# Altium PCB 智能颜色传感器模块.PCBDOC
Units mm, origin at the board's own origin, x right, y up, seen from the top; angles counter-clockwise.
Board outline 152.4 x 101.6 mm, 2 copper layers (Top Layer, Bottom Layer); 16 components, 12 nets, 82 pads, 8 vias.
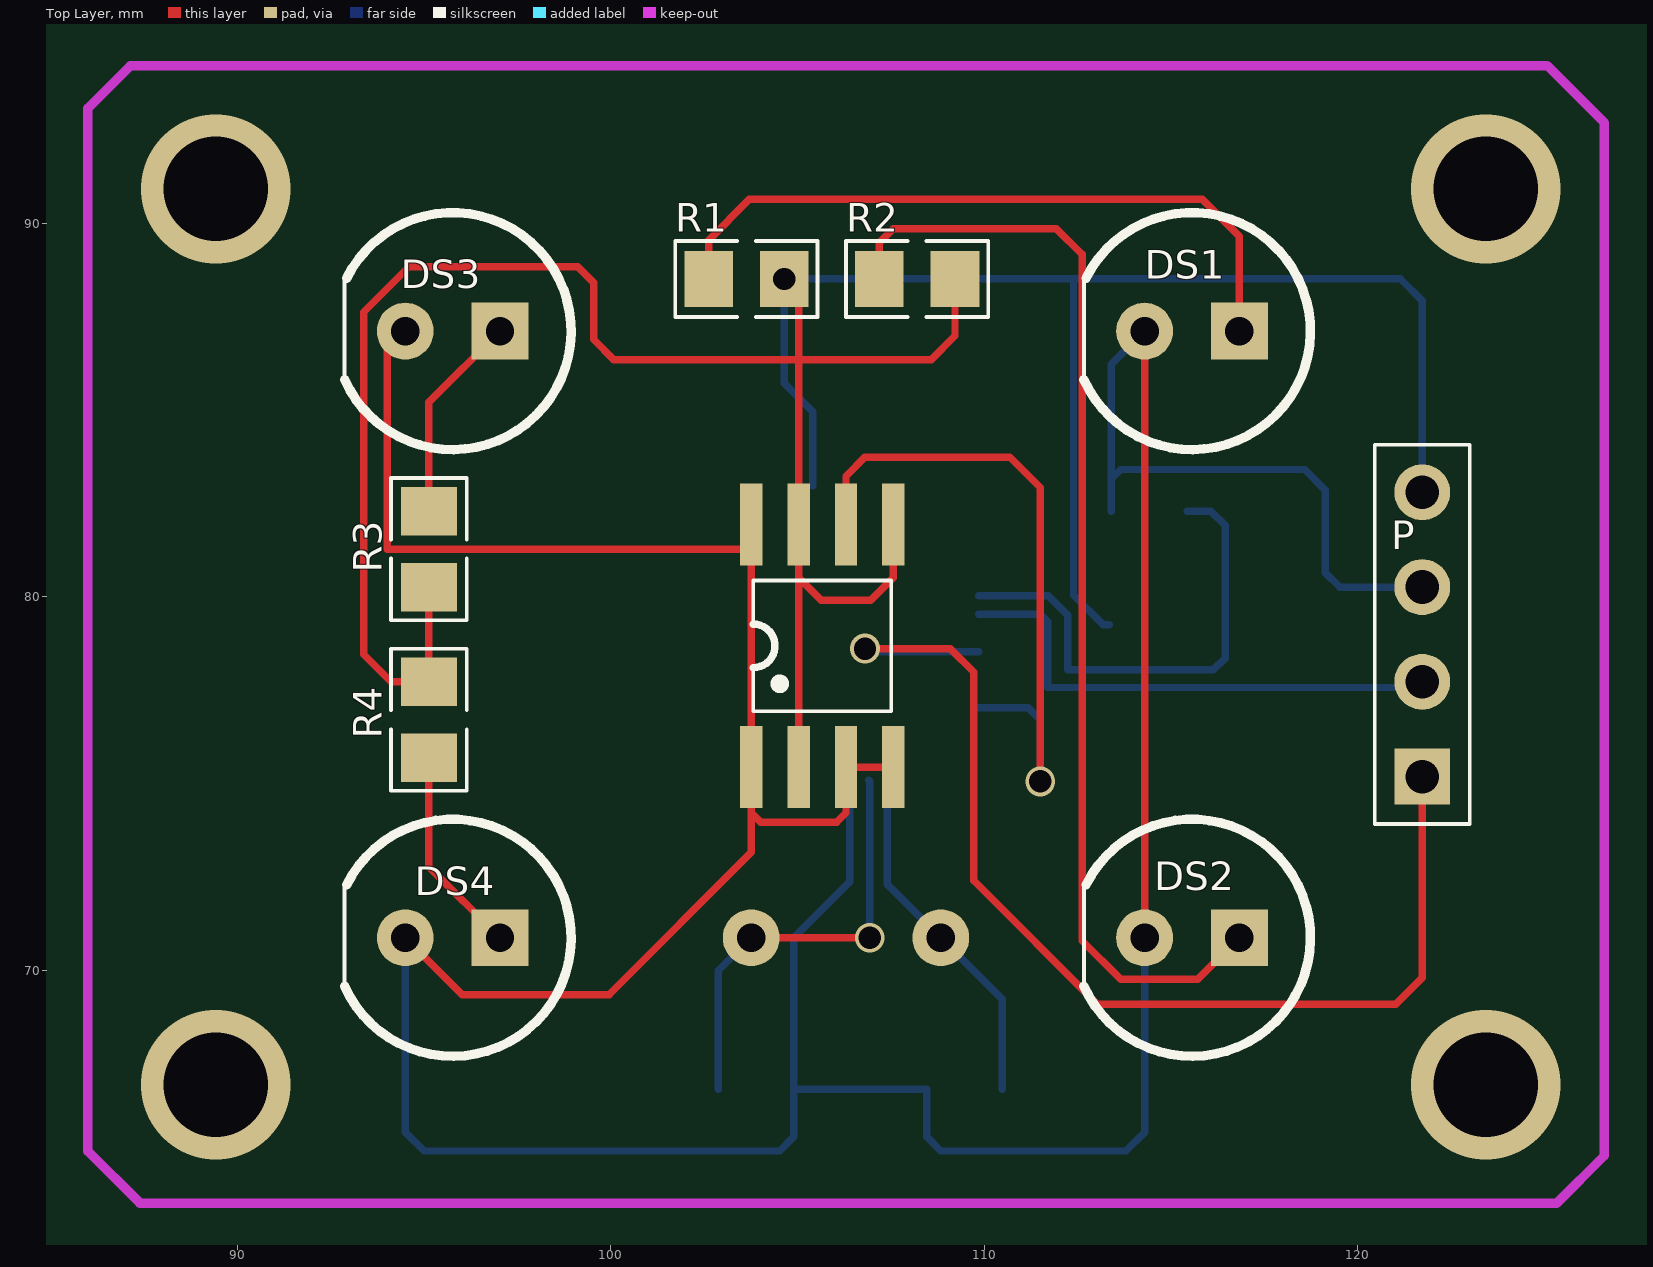
[diagram p0: Top Layer view]
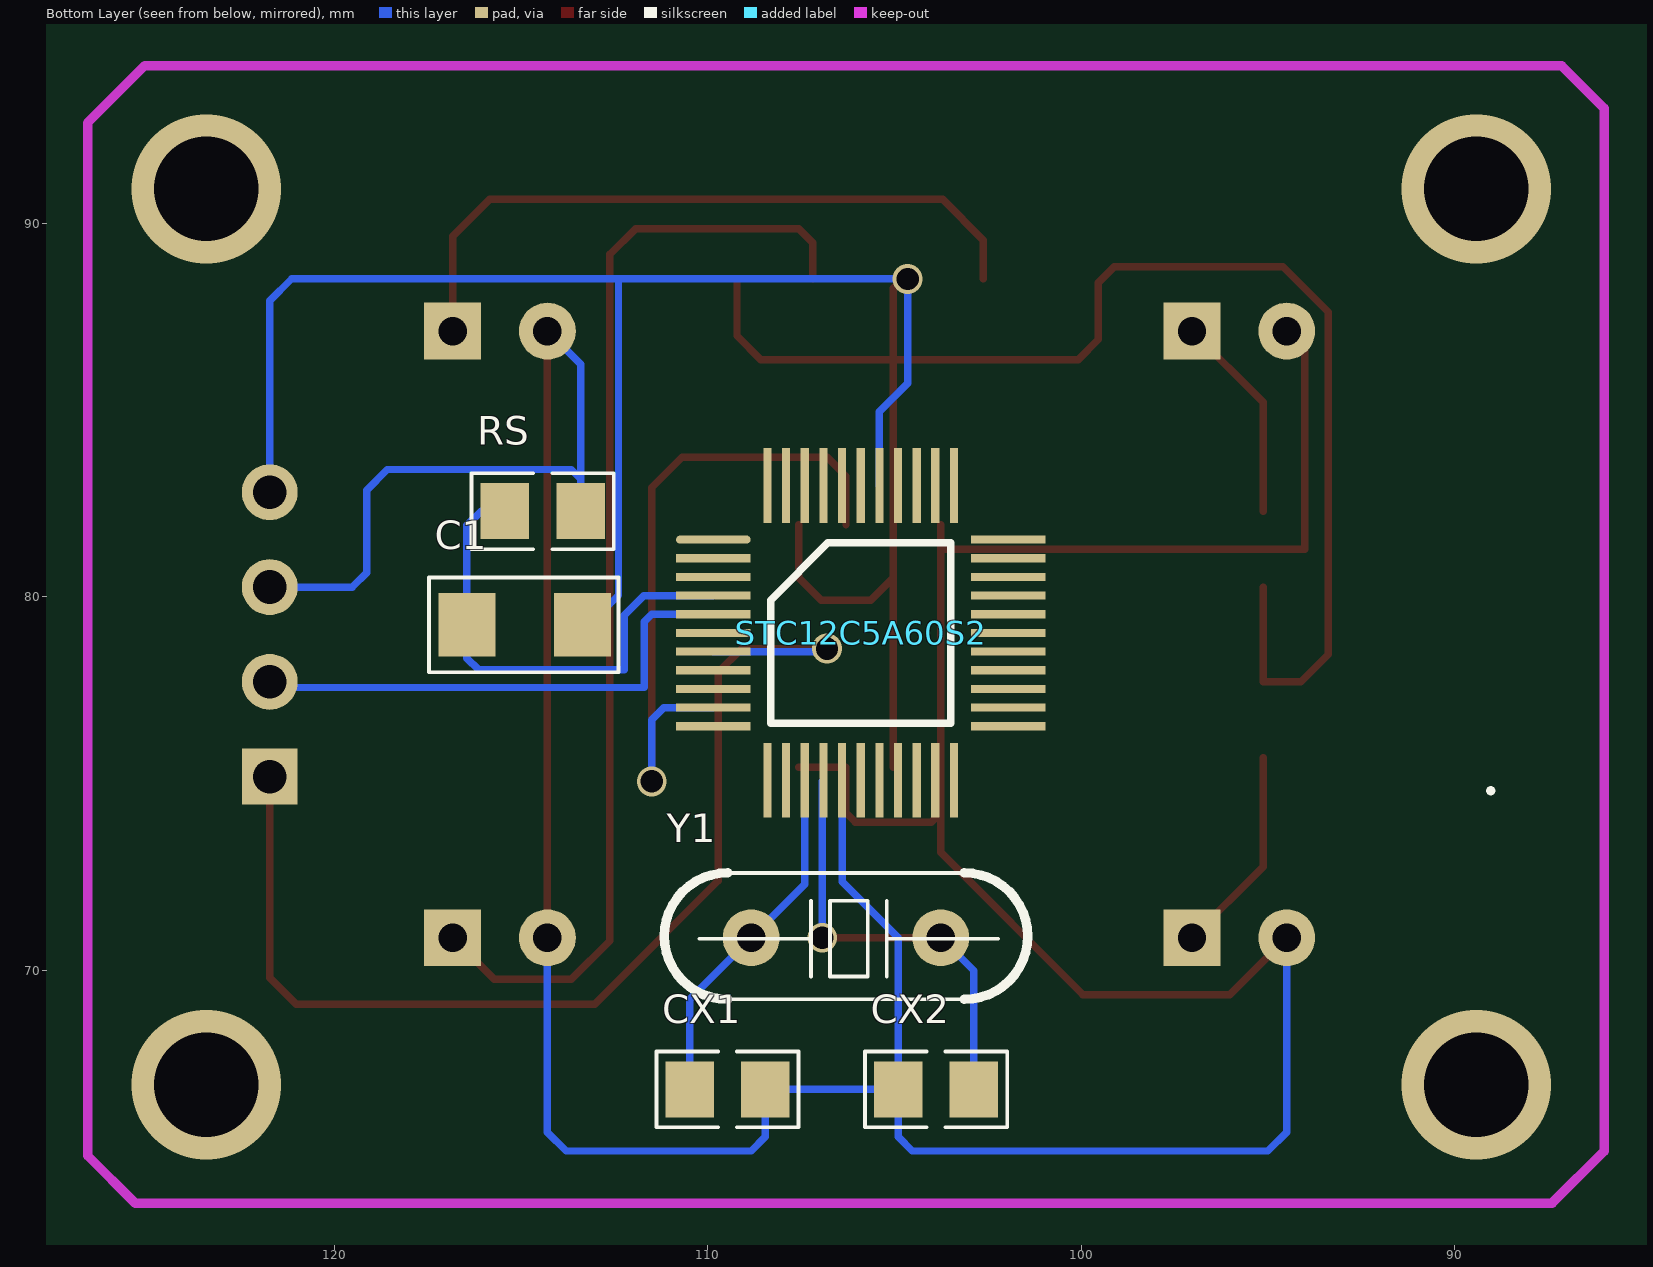
[diagram p1: Bottom Layer view, seen from below]

## Layer stack, top to bottom
Top Layer: signal copper 0.0356
Dielectric: dielectric 0.32, FR-4, Dk 4.8
Bottom Layer: signal copper 0.0356

## Board outline
25.4,25.4 177.8,25.4 177.8,127 25.4,127

## Design rules (kind name [scope] priority, off if disabled: settings)
Clearance [All] p1: gap=0.254
ComponentClearance [All] p1: gap=0.254 collisioncheckmode=0 verticalgap=0.254
PolygonConnect [All] p1: connectstyle=Relief reliefconductorwidth=0.254 reliefentries=4 polygonreliefangle="90 Angle"
RoutingVias [All] p1: holewidth=0.6 width=0.8 viastyle="Through Hole" minholewidth=0.6 minwidth=0.8 maxholewidth=0.6 maxwidth=0.8
SolderMaskExpansion [All] p1: expansion=0.102
TestPointUsage [All] p1: valid=0 allowmultiple=FALSE
Testpoint [All] p1: side=15 testpointundercomponent=TRUE minsize=1.016 maxsize=2.54 preferedsize=1.524 minholesize=0 maxholesize=1.016 preferedholesize=0.813 testpointgrid=0.025 style=1023 order=0123456789
Width [All] p1: maxlimit=0.2 minlimit=0.2 preferedwidth=0.2
17 further rules are at their usual default settings.

## Classes and differential pairs
component class Sheet1: C1 CX1 CX2 DS1 DS2 DS3 DS4 P R1 R2 R3 R4 RS Y1 ""

## Components (designator, comment, footprint, x,y, rotation, side; value= is the part's Value field where it differs from the comment)
C1 "10uf" 10uf 112.395,77.978 r0 bottom
CX1 "30p" TP-0805-R 106.934,65.532 r180 bottom
CX2 "30p" TP-0805-R 106.426,68.072 r0 bottom
DS1 "LED1" LED_5 114.3,84.582 r180 top
DS2 "LED1" LED_5 114.3,68.326 r180 top
DS3 "LED1" LED_5 94.488,84.582 r180 top
DS4 "LED1" LED_5 94.488,68.326 r180 top
P "" HDR-4 123.063,81.534 r90 top
R1 "Res2" TP-0805-R 106.172,87.249 r0 top
R2 "Res2" TP-0805-R 110.744,87.249 r0 top
R3 "Res2" TP-0805-R 93.853,78.74 r270 top
R4 "Res2" TP-0805-R 96.393,79.248 r90 top
RS "10k" TP-0805-R 116.967,83.566 r0 bottom
STC12C5A60S2 "" stc12c5a60s2 109.855,81.534 r180 bottom
TCS230 "" CDFP-8 108.204,74.93 r0 top
Y1 "Y" JZ_ZC 108.839,70.866 r0 bottom

## Footprints (in the part's own frame and the unit in brackets; to place one, negate y for a bottom-side part, rotate by r counter-clockwise, add the part's x,y. Pads: shape width x height; smd on the part's side, far side on the other; paste and mask are expansions set on the pad)
10uf [mil] "10贴片电容"
  rect 60x66.93 smd: 1(37.95,-50) 2(160,-50)
  silkscreen extent 0,-100 200,0
CDFP-8 [mm] "贴片8管脚"
  rect 0.6x2.2 smd: 1(-4.445,0.508) 2(-3.175,0.508) 3(-1.905,0.508) 4(-0.635,0.508) 5(-0.635,7.008) 6(-1.905,7.008) 7(-3.175,7.008) 8(-4.445,7.008)
  silkscreen extent -4.39,2.01 -0.69,5.51
HDR-4 [mm] "4排针"
  rect 1.5x1.5 hole 0.9: 1(-6.35,1.322)
  round 1.5 hole 0.9: 2(-3.81,1.322) 3(-1.27,1.322) 4(1.27,1.322)
  silkscreen extent -7.62,0.05 2.54,2.59
JZ_ZC [mil] "晶振"
  round 60 hole 30: 1(-200,0) 2(0,0)
  silkscreen extent -292,-68 92,65
LED_5 [mil] "发光二极管 5MM"
  rect 60x60 hole 30: 1(-100,-100)
  round 60 hole 30: 2(0,-100)
  silkscreen extent -175,-225 64,25
stc12c5a60s2 [mm]
  oval 2x0.22 smd: 1(0,0)
  rect 2x0.22 smd: 2(0,-0.5) 3(0,-1) 4(0,-1.5) 5(0,-2) 6(0,-2.5) 7(0,-3) 8(0,-3.5) 9(0,-4) 10(0,-4.5) 11(0,-5) 23(7.9,-5) 24(7.9,-4.5) 25(7.9,-4) 26(7.9,-3.5) 27(7.9,-3) 28(7.9,-2.5) 29(7.9,-2) 30(7.9,-1.5) 31(7.9,-1) 32(7.9,-0.5) 33(7.9,0)
  rect 0.22x2 smd: 12(1.45,-6.45) 13(1.95,-6.45) 14(2.45,-6.45) 15(2.95,-6.45) 16(3.45,-6.45) 17(3.95,-6.45) 18(4.45,-6.45) 19(4.95,-6.45) 20(5.45,-6.45) 21(5.95,-6.45) 22(6.45,-6.45) 34(6.45,1.45) 35(5.95,1.45) 36(5.45,1.45) 37(4.95,1.45) 38(4.45,1.45) 39(3.95,1.45) 40(3.45,1.45) 41(2.95,1.45) 42(2.45,1.45) 43(1.95,1.45) 44(1.45,1.45)
  silkscreen extent 1.54,-4.92 6.36,-0.08
TP-0805-R [mm] "贴片0805"
  rect 1.3x1.5 smd: 1(-3.556,1.27) 2(-1.524,1.27)
  silkscreen extent -4.44,0.25 -0.63,2.29

## Part data
C1: library part "CAPACITOR POL", "Capacitor"
CX1 CX2: library part CAP, "Capacitor"
DS1 DS2 DS3 DS4: "Typical RED GaAs LED"
P: library part PZ_4, "排针——4"
R1 R2 R3 R4: "Resistor"
RS: library part RES2
STC12C5A60S2: library part STC12C5A60S2_LQFP
TCS230: library part TCS230, "颜色识别传感器"
Y1: library part CRYSTAL, "Crystal"

## Via types
v1: diameter 0.8, hole 0.6, Top Layer to Bottom Layer, 4 vias
v2: diameter 4, hole 2.8, Top Layer to Bottom Layer, 4 vias

## Nets (pads, with @x,y where several pads share a name; then routed paths per layer and width w, separated by ;. In a path a pad name is that pad's centre, name@x,y a point inside that pad or via, vN(x,y) a via of type N, cw(c..) or ccw(c..) an arc to the next point about the centre after c; other vN are vias at no path point)
GND: CX1.2 CX2.2 DS1.2 DS2.2 DS3.2 DS4.2 P.3 RS.1 STC12C5A60S2.16 TCS230.1 TCS230.3 TCS230.4 TCS230.8 | length 116.2
  Top Layer w0.2: DS4.2 96.012,69.342 99.949,69.342 103.759,73.152 TCS230.1 TCS230.8@103.759,81.28 ; DS3.2 94.005,86.639 94.005,81.28 TCS230.8@103.759,81.28 ; 103.759,74.219 104.013,73.965 106.045,73.965 106.299,74.219 TCS230.3 TCS230.4 ; TCS230.8 TCS230.8@103.759,81.28 ; DS2.2 DS1.2
  Bottom Layer w0.2: DS4.2 94.488,65.659 94.996,65.151 104.521,65.151 104.902,65.532 104.902,70.866 106.405,72.369 STC12C5A60S2.16 ; CX2.2 CX1.2 108.458,65.532 108.839,65.151 113.792,65.151 114.3,65.659 DS2.2 ; RS.1 113.411,86.233 DS1.2 ; 113.411,83.16 113.665,83.414 118.591,83.414 119.144,82.861 119.144,80.645 119.525,80.264 P.3
H: C1.1 P.4 R1.2 R2.2 R3.2 R4.2 STC12C5A60S2.38 TCS230.2 TCS230.5 TCS230.7 | length 89.7
  Top Layer w0.2: R3.2 R4.2 94.107,77.724 93.37,78.461 93.37,87.63 94.59,88.849 99.111,88.849 99.538,88.422 99.538,86.898 100.076,86.36 108.585,86.36 109.22,86.995 R2.2 ; v1(104.648,88.519) 104.775,88.519 105.029,88.265 TCS230.2 ; 105.029,80.518 105.639,79.908 106.959,79.908 107.569,80.518 TCS230.5
  Bottom Layer w0.2: STC12C5A60S2.38 105.405,84.963 104.648,85.72 v1(104.648,88.519) 121.158,88.519 121.741,87.936 P.4 ; 112.395,88.519 112.395,80.042 113.189,79.248 C1.1
NetDS1_1: DS1.1 R1.1 | length 18.7
  Top Layer w0.2: R1.1 102.616,89.56 103.708,90.653 115.849,90.653 116.84,89.662 DS1.1
NetDS2_1: DS2.1 R2.1 | length 30.3
  Top Layer w0.2: R2.1 107.188,89.484 107.569,89.865 111.938,89.865 112.624,89.179 112.624,70.79 113.663,69.75 115.724,69.75 DS2.1
NetDS3_1: DS3.1 R3.1 | length 5.6
  Top Layer w0.2: R3.1 95.123,85.217 DS3.1
NetDS4_1: DS4.1 R4.1 | length 5.6
  Top Layer w0.2: R4.1 95.123,72.771 DS4.1
OUT: STC12C5A60S2.10 TCS230.6 | length 18.4
  Top Layer w0.2: TCS230.6 106.299,83.236 106.807,83.744 110.693,83.744 111.506,82.931 v1(111.506,75.057)
  Bottom Layer w0.2: STC12C5A60S2.10 111.18,77.034 111.506,76.708 v1(111.506,75.057)
RST: C1.2 RS.2 STC12C5A60S2.4 | length 13.1
  Bottom Layer w0.2: STC12C5A60S2.4 111.717,80.034 112.243,79.508 112.243,78.044 116.144,78.044 116.459,78.359 116.459,81.915 116.078,82.296 RS.2
RXD: P.2 STC12C5A60S2.5 | length 13.8
  Bottom Layer w0.2: STC12C5A60S2.5 111.506,79.534 111.709,79.331 111.709,77.572 121.437,77.572 121.59,77.724 P.2
TXD: P.1 STC12C5A60S2.7 | length 30.9
  Top Layer w0.2: v1(106.807,78.613) 109.093,78.613 109.728,77.978 109.728,72.39 113.03,69.088 121.031,69.088 121.741,69.798 P.1
  Bottom Layer w0.2: v1(106.807,78.613) 106.886,78.534 STC12C5A60S2.7
XTAL1: CX2.1 STC12C5A60S2.15 Y1.1 | length 11.8
  Top Layer w0.2: Y1.1 v1(106.934,70.866)
  Bottom Layer w0.2: CX2.1 102.87,69.977 Y1.1 ; STC12C5A60S2.15 106.934,75.055 v1(106.934,70.866)
XTAL2: CX1.1 STC12C5A60S2.14 Y1.2 | length 9.6
  Bottom Layer w0.2: STC12C5A60S2.14 107.405,72.3 110.49,69.215 CX1.1
pads on no net: STC12C5A60S2.1 STC12C5A60S2.2 STC12C5A60S2.3 STC12C5A60S2.6 STC12C5A60S2.8 STC12C5A60S2.9 STC12C5A60S2.11 STC12C5A60S2.12 STC12C5A60S2.13 STC12C5A60S2.17 STC12C5A60S2.18 STC12C5A60S2.19 STC12C5A60S2.20 STC12C5A60S2.21 STC12C5A60S2.22 STC12C5A60S2.23 STC12C5A60S2.24 STC12C5A60S2.25 STC12C5A60S2.26 STC12C5A60S2.27 STC12C5A60S2.28 STC12C5A60S2.29 STC12C5A60S2.30 STC12C5A60S2.31 STC12C5A60S2.32 STC12C5A60S2.33 STC12C5A60S2.34 STC12C5A60S2.35 STC12C5A60S2.36 STC12C5A60S2.37 STC12C5A60S2.39 STC12C5A60S2.40 STC12C5A60S2.41 STC12C5A60S2.42 STC12C5A60S2.43 STC12C5A60S2.44
copper on no net:
  other v2: 89.408,66.929 123.444,66.929 89.408,90.932 123.444,90.932

## Keep-outs
Keep-Out Layer:
  lines w0.254: 85.979,65.151 85.979,92.964 85.979,93.091 87.122,94.234 125.095,94.234 126.619,92.71 126.619,65.024 125.349,63.754 87.376,63.754 85.979,65.151

## Silkscreen, mask and mechanical layers (free items; w line width, h text height)
Bottom Overlay:
  circle w0.254: c89.027,74.803 r0
Mechanical 1:
  lines w0.254: 85.979,65.151 87.376,63.754 ; 85.979,65.151 85.979,93.091 ; 85.979,65.151 87.376,63.754 ; 85.979,65.151 85.979,93.091 ; 85.979,93.091 87.122,94.234 ; 85.979,93.091 87.122,94.234 ; 87.122,94.234 125.095,94.234 ; 87.122,94.234 125.095,94.234 ; 87.376,63.754 125.349,63.754 ; 87.376,63.754 125.349,63.754 ; 125.095,94.234 126.619,92.71 ; 125.095,94.234 126.619,92.71 ; 125.349,63.754 126.619,65.024 ; 125.349,63.754 126.619,65.024 ; 126.619,65.024 126.619,92.71 ; 126.619,65.024 126.619,92.71